# EAGLE board ANAL_3_ETH REV 1_0B (EAGLE 7.6.0)
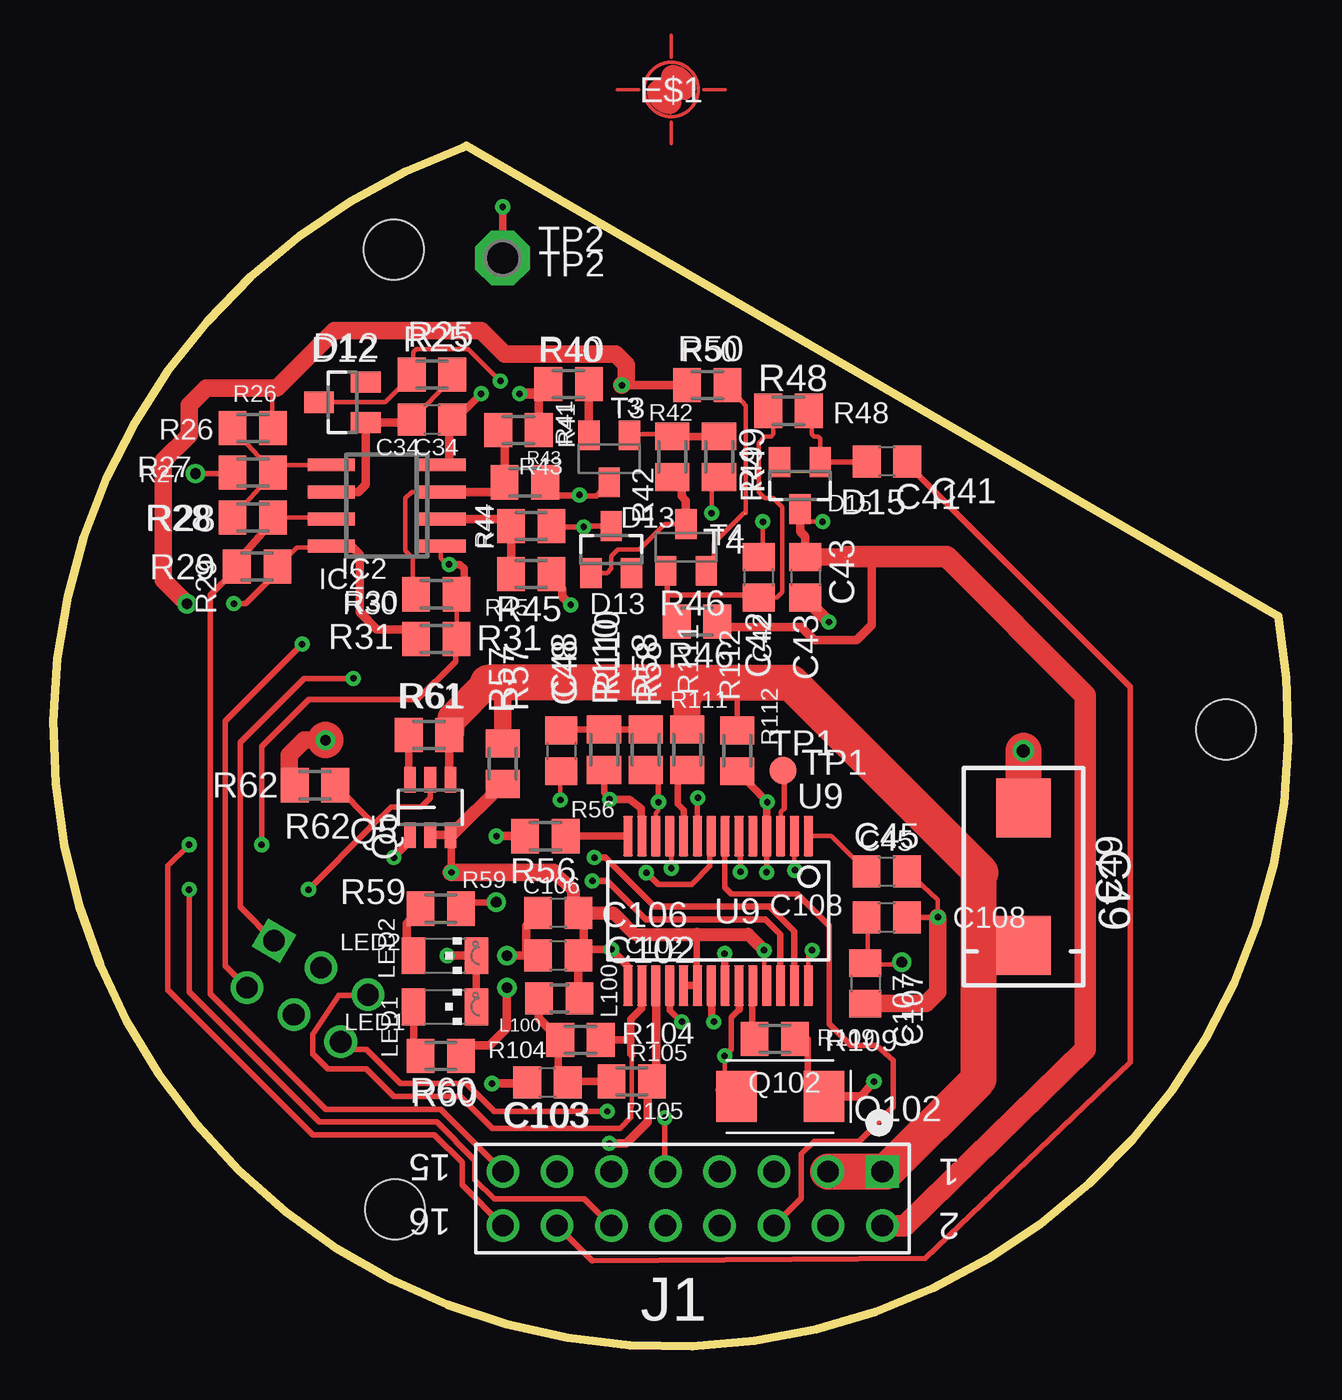
[diagram p0: board, top side]
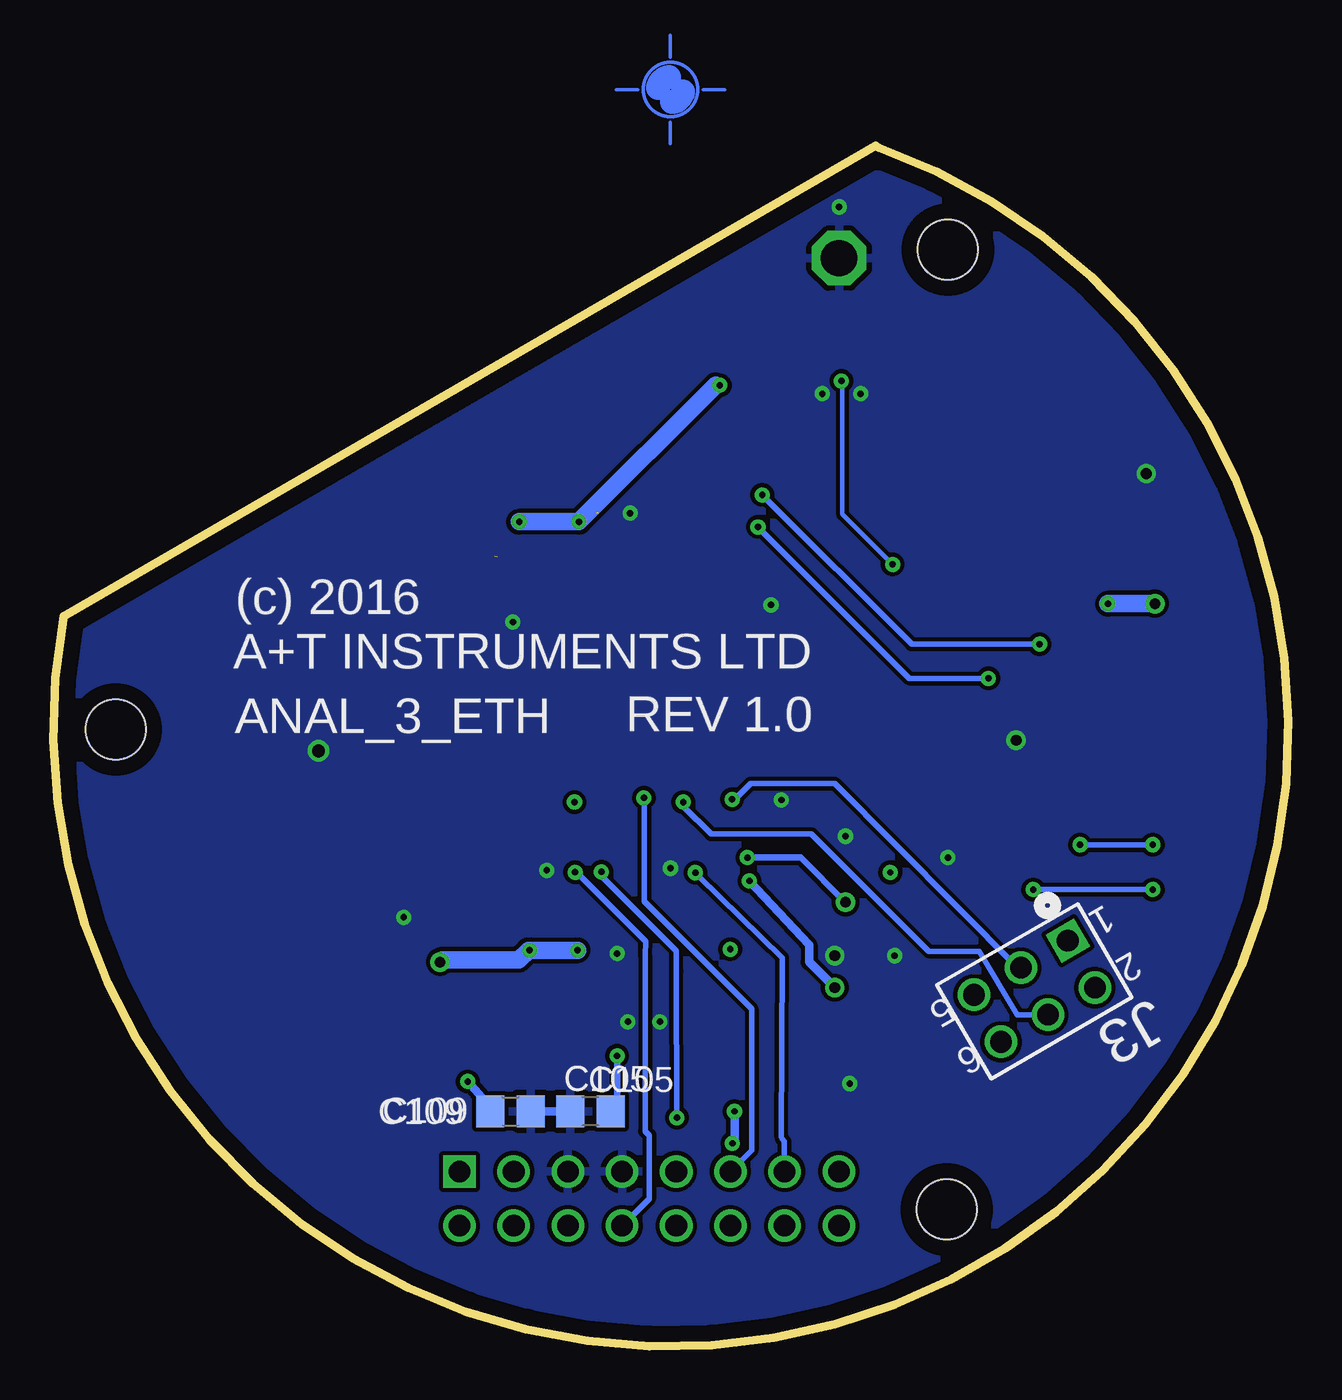
[diagram p1: board, bottom side, seen from below]

Size 57.88 x 56.27 mm. Coordinates in mm from the lower left corner, seen from the top.
Outline: 19.34,56.27 57.26,34.31
Outline: 57.4,34.22 arc-261 19.19,56.18
Copper layers (1*2*15*16): Top-VerticalRoutes 0.035mm / dielectric 0.5mm / GND 0.035mm / dielectric 0.5mm / 3V3&5V 0.035mm / dielectric 0.5mm / BottomnHorizontalroutes 0.035mm
Design rules "default *": minimum track width 0.2mm, minimum drill 0.3mm, track to track 6mil, track to pad 6mil, pad to pad 6mil, via to via 6mil, smd to smd 6mil, copper to edge 30mil, drill to drill 8mil, minimum pad ring 10mil, minimum via ring 8mil, stop-mask expansion 4mil, vias tented up to drill 0.31mm, thermal gap 10mil
Net classes: 0 default: width 0.2 mm, drill 0.2 mm, clearance 0.2 mm; 1 GND: width 0.2 mm, drill 0.2 mm, clearance 0.2 mm to class 0, clearance 0.2 mm; 2 5V: width 0.2 mm, drill 0.2 mm, clearance 0.2 mm to class 0, clearance 0.2 mm; 3 3v3: width 0.2 mm, drill 0.2 mm, clearance 0.2 mm to class 0, clearance 0.2 mm to class 1, clearance 0.2 mm to class 2, clearance 0.2 mm
Holes 2.8 mm at 15.96,51.41 54.96,28.91 16.01,6.41

## Footprints (pad centres in the part's own frame; a part is rotated, then mirrored left to right if it is on the bottom)
C0805 = smd 1.3 x 1.5: 1 -0.95,0; 2 0.95,0
CAPC7343X31 = smd 2.77 x 2.55: + 3.22,0; - -3.22,0
SOT23 = smd 1 x 1.4: 1 -0.95,-1.1; 2 0.95,-1.1; 3 0,1.1
SO08 = smd 0.6 x 2.2: 1 -1.905,-2.6; 2 -0.635,-2.6; 3 0.635,-2.6; 4 1.905,-2.6; 5 1.905,2.6; 6 0.635,2.6; 7 -0.635,2.6; 8 -1.905,2.6
SAMTEC_TSW-108-08-L-D = drill 1.016 square: 1 -17.78,-2.54 | drill 1.016: 2 -17.78,0; 3 -15.24,-2.54; 4 -15.24,0; 5 -12.7,-2.54; 6 -12.7,0; 7 -10.16,-2.54; 8 -10.16,0; 9 -7.62,-2.54; 10 -7.62,0; 11 -5.08,-2.54; 12 -5.08,0; 13 -2.54,-2.54; 14 -2.54,0; 15 0,-2.54; 16 0,0
SAMTEC_TSW-103-08-L-D = drill 1.016 square: 1 -5.08,-2.54 | drill 1.016: 2 -5.08,0; 3 -2.54,-2.54; 4 -2.54,0; 5 0,-2.54; 6 0,0
INDC2012X90 = smd 1.3 x 1.5: 1 -0.95,0; 2 0.95,0
LEDC3216X110L60N = smd 1.73 x 1.1: A 0,-1.47; C 0,1.47
SOT23-6 = smd 0.55 x 1.2: 1 -0.95,-1.3; 2 0,-1.3; 3 0.95,-1.3; 4 0.95,1.3; 5 0,1.3; 6 -0.95,1.3
ABRACON-ABM3 = smd 1.9 x 2.4: 1 -2.05,0; 2 2.05,0
M0805 = smd 1.3 x 1.6: 1 -0.95,0; 2 0.95,0
SOT23-BEC = smd 1 x 1.4: B -0.95,-1.1; C 0,1.1; E 0.95,-1.1
B1,27 = smd 1.27 x 1.27: TP 0,0
P1-17 = drill 1.702 pad 2.54 octagon: TP 0,0
SOP65P780X200-28N = smd 0.45 x 1.9: 1 -4.225,-3.505; 2 -3.575,-3.505; 3 -2.925,-3.505; 4 -2.275,-3.505; 5 -1.625,-3.505; 6 -0.975,-3.505; 7 -0.325,-3.505; 8 0.325,-3.505; 9 0.975,-3.505; 10 1.625,-3.505; 11 2.275,-3.505; 12 2.925,-3.505; 13 3.575,-3.505; 14 4.225,-3.505; 15 4.225,3.505; 16 3.575,3.505; 17 2.925,3.505; 18 2.275,3.505; 19 1.625,3.505; 20 0.975,3.505; 21 0.325,3.505; 22 -0.325,3.505; 23 -0.975,3.505; 24 -1.625,3.505; 25 -2.275,3.505; 26 -2.925,3.505; 27 -3.575,3.505; 28 -4.225,3.505

## Placement (x,y rotation side)
C34  1n  [C0805]  17.75,43.45 0 top
C41  10u  [C0805]  39.07,41.47 180 top
C42  1n  [C0805]  33.05,36.05 270 top
C43  100n  [C0805]  35.25,36.05 270 top
C45  10u  [C0805]  39.06,22.26 0 top
C48  100n  [C0805]  23.81,27.91 270 top
C49  100u  [CAPC7343X31]  45.47,22.01 270 top
C102  100n  [C0805]  23.66,18.31 180 top
C103  100n  [C0805]  23.16,12.36 180 top
C105  27p  [C0805]  32.71,11.01 180 bottom
C106  100n  [C0805]  23.66,20.31 180 top
C107  100n  [C0805]  38.06,17.01 270 top
C108  100n  [C0805]  39.06,20.11 0 top
C109  27p  [C0805]  36.46,11.01 0 bottom
D12  BAV199  [SOT23]  13.55,44.25 90 top
D13  BAV199  [SOT23]  26.15,37.35 0 top
D15  BAV199  [SOT23]  34.99,40.35 180 top
E$1  [PASS-ROUND]  28.96,58.91 0 top
E$3  [PASS-ROUND]  71.11,29.61 0 top  (outside the outline)
IC2  TLC393D  [SO08]  15.63,39.41 90 top
J1  TSW-108-14-F-D  [SAMTEC_TSW-108-08-L-D]  21.07,5.65 180 top
J3  TSW-103-14-F-D  [SAMTEC_TSW-103-08-L-D]  13.47,14.27 210 bottom
L100  120R@100M  [INDC2012X90]  23.71,16.31 180 top
LED1  GRN  [LEDC3216X110L60N]  18.36,15.91 270 top
LED2  YLW  [LEDC3216X110L60N]  18.36,18.31 270 top
Q5  TPS2708  [SOT23-6]  17.66,25.26 0 top
Q102  25MHz  [ABRACON-ABM3]  34.06,11.71 180 top
R25  680k  [M0805]  17.75,45.55 0 top
R26  47k  [M0805]  9.35,43.05 0 top
R27  56k  [M0805]  9.35,40.95 0 top
R28  200k  [M0805]  9.35,38.85 180 top
R29  4k7  [M0805]  9.55,36.55 0 top
R30  1M5  [M0805]  17.95,35.25 0 top
R31  47k  [M0805]  17.95,33.15 180 top
R40  82R  [M0805]  24.15,45.1 180 top
R41  1M5  [M0805]  21.8,42.95 0 top
R42  4k7  [M0805]  29,41.7 90 top
R43  47k  [M0805]  22.1,40.5 0 top
R44  47k  [M0805]  22.4,38.45 0 top
R45  470k  [M0805]  22.4,36.2 0 top
R46  10k  [M0805]  30.17,33.97 180 top
R48  10k  [M0805]  34.45,43.85 0 top
R49  4k7  [M0805]  31.2,41.7 270 top
R50  82R  [M0805]  30.65,45.05 0 top
R56  2.32k 1%  [M0805]  23.06,23.91 0 top
R57  DNF  [M0805]  21.06,27.31 90 top
R58  49R9  [M0805]  27.76,27.96 270 top
R59  180R  [M0805]  18.16,20.51 0 top
R60  180R  [M0805]  18.16,13.61 0 top
R61  DNF  [M0805]  17.61,28.66 0 top
R62  100k  [M0805]  12.26,26.3 0 top
R104  49R9  [M0805]  24.71,14.36 0 top
R105  49R9  [M0805]  27.11,12.41 180 top
R109  100R  [M0805]  33.81,14.41 180 top
R110  49R9  [M0805]  25.81,27.96 90 top
R111  100k  [M0805]  29.71,27.96 90 top
R112  100k  [M0805]  32.06,27.91 90 top
T3  BC817  [SOT23-BEC]  26.05,41.6 180 top
T4  BC807  [SOT23-BEC]  29.65,37.45 0 top
TP1  TPB1,27  [B1,27]  34.2,26.99 180 top
TP2  PTR1PAD1-17  [P1-17]  21.06,51.01 270 top
U9  ENC28J60-SOP  [SOP65P780X200-28N]  31.16,20.41 180 top

## Library data of the parts
C34 C41-C43 C45 C48 C102 C103 C105-C109 R25-R31 R40-R46 R48-R50 R56-R62 R104 R105 R109-R112 = rcl
C49 = Capacitors_AandT; DIGIKEY: 399-12105-1-ND; MANUFACTURER: Kemet; MOUSER: 80-T598D107M016E050; MPN: T598D107M016ATE050; PACKAGE: 7343; VOLTAGE: 16V
D12 D13 D15 = diode
E$1 E$3 = marks
IC2 = linear
J1 = SAMTEC-TSW-xxx-D_By_element14_Batch_1; MPN: TSW-108-14-F-D; OC_FARNELL: 2027002; PACKAGE: Post header-16Pin; SUPPLIER: Samtec
J3 = SAMTEC-TSW-xxx-D_By_element14_Batch_1; MPN: TSW-103-08-L-D; OC_FARNELL: 2025629; OC_NEWARK: 12P1330; PACKAGE: Post header-6Pin; SUPPLIER: Samtec
L100 = IND_AandT; FARNELL: 1635711; MANUFACTURER: WURTH; MPN: 74279202; RS: 358-6721
LED1 = led; FARNELL: 2062307
LED2 = led; FARNELL: 2062218; MANUFACTURER: Lumex; MPN: SML-LX1206SYC-TR
Q5 = Transistor_AandT; FARNELL: 2323775; MANUFACTURER: TI; MARKING: AUA; MPN: TPS27081A; PACKAGE: SOT23-6; RS: 809-5429
Q102 = Crystals_AnT; FARNELL: 2101328
T3 T4 = transistor
TP1 TP2 = testpad
U9 = Microchip_AandT; DIGIKEY: ENC28J60-I/SS-ND; FARNELL: 1811239; MANUFACTURER: MICROCHIP; MPN: ENC28J60-I/SS; PACKAGE: SSOP-28; RS: 770-7755

## Nets
+3V3 [3v3]: C49.+ J1.1 J1.3 Q5.4 R57.2 R61.2 R111.2 R112.2
+5V [5V]: C42.1 C43.1 D15.3 IC2.8 J1.2 R26.2 R29.2 R31.2 R46.1 R50.1
COMMSA: D13.3 J3.1 R44.2
COMMSB: J3.2 R43.2 T3.C
GND: C34.2 C43.2 C45.2 C48.2 C49.- C102.2 C103.2 C105.2 C106.2 C107.2 C108.2 C109.2 IC2.4 J1.5 J1.7 LED1.C LED2.C Q5.1 R27.1 R40.2 R41.2 R45.2 R49.2 R56.1 R62.1 TP2.TP U9.2 U9.11 U9.18 U9.21 U9.22
LDA: LED1.A R60.1
LDB: LED2.A R59.1
LEDA: R59.2 U9.27
LEDB: R60.2 U9.26
N$1: IC2.2 R44.1 R45.1
N$3: C34.1 D12.1 IC2.6 R25.2
N$4: IC2.3 R30.1 R41.1 R43.1
N$5: Q5.6 R61.1
N$6: R40.1 T3.E
N$7: R50.2 T4.E
N$8: R42.2 R49.1 T3.B
N$9: IC2.5 R26.1 R27.2 R28.2
N$14: R109.2 U9.24
N$15: C42.2 R46.2 R48.1 T4.B
N$16: C41.2 D15.1 R48.2
N$22: D13.1 R42.1 T4.C
N$41: C109.1 Q102.1 R109.1
N$64: C45.1 U9.1
N$160: C48.1 R58.1 R110.2
NETBUSY: IC2.7 J1.15 R28.1 R29.1
NETRX: D12.3 IC2.1 J1.16 R25.1 R30.2 R31.1
NETTX: C41.1 J1.14
OSC1: C105.1 Q102.2 U9.23
PHY3V3: C102.1 C106.1 C107.1 C108.1 L100.1 Q5.2 Q5.3 R57.1 U9.15 U9.19 U9.20 U9.25 U9.28
PHY-POWER: J1.12 Q5.5 R62.2
PHY_CS: J1.11 U9.9
PHY_INTERRUPT: J1.8 R112.1 U9.4
PHY_RESET: R111.1 U9.10
PHY_SCK: J1.13 U9.8
PHY_SI: J1.6 U9.7
PHY_SO: J1.9 U9.6
PHYCLKOUT: TP1.TP U9.3
RBIAS: R56.2 U9.14
TP3V3: C103.1 L100.2 R104.1 R105.2
TPIN+: J3.3 R110.1 U9.13
TPIN-: J3.4 R58.2 U9.12
TPOUT+: J3.6 R105.1 U9.17
TPOUT-: J3.5 R104.2 U9.16

## Tracks (layer width: path | path; a pad name or v marks a point on that pad's centre or on a via)
+3V3
  Top-VerticalRoutes 0.254: 31.91,28.86 32.06,29.01 32.06,31.11 | C49.+ 43.44,18.79 43.36,18.71
  Top-VerticalRoutes 0.35: Q5.4 18.56,26.61
  Top-VerticalRoutes 0.406: 18.56,26.61 R61.2
  Top-VerticalRoutes 0.813: R112.2 31.91,28.86 | 18.61,28.71 R61.2 | R57.2 21.06,31.11
  Top-VerticalRoutes 1.27: 29.71,30.46 R111.2 29.71,30.66 30.36,31.11 | 18.61,28.71 18.71,29.46
  Top-VerticalRoutes 1.422: 29.71,30.46 29.76,31.11 | 18.71,29.46 20.36,31.11
  Top-VerticalRoutes 1.676: 29.76,31.11 21.06,31.11 20.36,31.11 | 30.36,31.11 32.06,31.11 34.56,31.11 43.46,22.21 43.36,22.11 43.36,18.71 43.36,12.51 39.04,8.19 J1.1 J1.3
+5V  (via drill 0.3, 0.5)  (1 unrouted)
  Top-VerticalRoutes 0.2: C42.1 33.05,37.35 33.25,37.55 v33.25,38.65 | D15.3 35.05,38.79 35.05,38.65 v36.05,38.65 | 12.48,37.5 arc45 12.35,37.45 11.4,37.45 R29.2 | 10.25,44.95 10.25,43.1 R26.2
  Top-VerticalRoutes 0.254: v8.46,34.81 9.03,34.81 10.5,36.28 R29.2 | 10.46,44.91 10.42,44.95 10.25,44.95
  Top-VerticalRoutes 0.406: C43.1 35.25,37.95 35,38.2 D15.3 | 27.75,45.05 v26.65,45.05 R50.1 | 12.48,37.5 IC2.8 13.96,37.5 14.36,37.11 14.36,34.41 15.16,33.61 16.54,33.61 R31.2 | R46.1 31.38,33.71 35.06,33.71 35.66,33.11 37.66,33.11 38.36,33.81 38.36,37.01
  Top-VerticalRoutes 0.813: C43.1 37.09,37 | v26.65,45.05 26.86,45.26 26.86,46.01 26.36,46.51 21.16,46.51 20.06,47.61 13.16,47.61 10.46,44.91 7.16,44.91 6.36,44.11 6.36,42.71 5.16,41.51 5.16,35.91 v6.26,34.81
  Top-VerticalRoutes 1.016: 37.2,37.01 38.36,37.01 41.86,37.01 48.36,30.51 48.36,13.91 39.9,5.65 J1.2
  BottomnHorizontalroutes 0.254: v8.46,34.81 8.36,34.91
  BottomnHorizontalroutes 0.406: v26.65,45.05 26.85,45.05
  BottomnHorizontalroutes 0.813: v36.05,38.65 v33.25,38.65 26.85,45.05 | v6.26,34.81 v8.46,34.81
COMMSA  (via drill 0.3)
  Top-VerticalRoutes 0.254: J3.1 8.76,20.59 8.76,28.31 11.76,31.31 v14.06,31.31 | R44.2 23.39,38.41 v24.86,38.41 24.9,38.45 D13.3
  BottomnHorizontalroutes 0.254: v24.86,38.41 17.76,31.31 v14.06,31.31
COMMSB  (via drill 0.3)
  Top-VerticalRoutes 0.254: T3.C 25.45,39.85 23.45,39.85 R43.2 23.64,39.91 v24.66,39.91 | J3.2 8.06,17.82 8.06,29.31 v11.66,32.91
  BottomnHorizontalroutes 0.254: v24.66,39.91 17.66,32.91 v11.66,32.91
GND  (via drill 0.3, 0.5, 0.6)
  Top-VerticalRoutes 0.2: R49.2 30.9,40.7 30.9,40.35 30.85,40.35 v30.85,39.05 | U9.2 34.73,22.33 v34.76,22.31 | C48.2 24.36,26.91 | 23.76,27.01 v23.76,25.61 | 29.38,15.08 v29.46,15.21 | U9.11 28.96,23.79 v28.96,22.41 | C108.2 39.91,20.06 39.86,20.11 | R27.1 8.36,41.41 8.36,40.35 | v41.46,20.11 41.46,20.91 C45.2
  Top-VerticalRoutes 0.254: 39.86,20.11 v41.46,20.11 41.56,20.11 | IC2.4 18.55,41.31 18.56,41.31 | 18.56,43.31 C34.2 | R27.1 8.36,40.91 v6.66,40.91
  Top-VerticalRoutes 0.305: 23.76,27.01 C48.2 | U9.18 28.88,15.73 v29.46,15.21
  Top-VerticalRoutes 0.35: 18.75,43.4 19.4,44 v20.05,44.65 | U9.22 31.46,16.93 v31.46,18.41 | U9.21 30.86,16.88 30.86,15.31 v30.96,15.21 | LED1.C LED2.C | Q5.1 16.66,23.91 16.66,23.81 16.76,23.71 v15.96,22.91 | TP2.TP v21.06,53.41
  Top-VerticalRoutes 0.406: 18.75,43.4 C34.2 | R56.1 v20.76,23.91 | R45.2 23.85,35.5 23.85,35.15 v24.25,34.75 | R40.2 22.75,44.65 R41.2 | LED2.C v18.46,18.31 | 21.16,18.31 v21.26,18.31 22.06,18.31 | C102.2 22.06,18.31 | C106.2 22.71,20.26 22.16,19.71 22.16,18.41 22.06,18.31 | C103.2 22.16,12.31 v20.56,12.31 | 18.56,41.31 18.56,43.31
  Top-VerticalRoutes 0.5: 22.75,44.65 v21.85,44.65
  Top-VerticalRoutes 0.61: 36.4,33.95 v36.35,33.95 35.25,35.05 C43.2
  Top-VerticalRoutes 0.813: R62.1 11.06,26.55 11.06,27.71 11.76,28.41 v12.76,28.41 | C107.2 40.91,16.06 41.46,16.61 v41.46,20.11
  Top-VerticalRoutes 1.676: v12.75,28.42 v12.76,28.41 | C49.- v45.47,27.9 v45.46,27.91
  BottomnHorizontalroutes 0.2: C105.2 34.06,11.61
  BottomnHorizontalroutes 0.406: C109.2 C105.2
  pour BottomnHorizontalroutes: 56.72,33.54 57.1,28.7 56.44,23.36 55.29,19.34 53.64,15.92 51.43,12.29 48.3,8.77 44.88,5.74 41.31,3.59 36.9,1.94 32.12,0.89 25.68,0.89 20.56,2.1 16.65,3.76 11.09,7.17 5.76,13.01 2.12,20.11 0.91,25.29 0.8,31.29 1.74,36.24 3.44,40.81 5.54,44.72 8.84,48.63 12.25,51.5 17.63,54.7 19.1,55.33
LDA
  Top-VerticalRoutes 0.35: R60.1 16.96,14.06 16.96,14.21 16.89,14.28 LED1.A
LDB
  Top-VerticalRoutes 0.305: R59.1 17.06,20.51
  Top-VerticalRoutes 0.406: 17.06,20.51 17.06,20.41 16.56,19.81 16.56,18.74 LED2.A
LEDA  (via drill 0.3, 0.5)
  Top-VerticalRoutes 0.305: U9.27 34.73,19.43 33.56,20.61 28.16,20.61 25.86,22.91 v25.36,22.91 | R59.2 19.36,20.81 v20.76,20.81
  Top-VerticalRoutes 0.35: U9.27 34.76,16.88
  BottomnHorizontalroutes 0.305: v25.36,22.91 22.86,22.91 v20.76,20.81
LEDB  (via drill 0.3, 0.5)
  Top-VerticalRoutes 0.305: 34.06,16.88 34.06,19.31 33.36,20.01 27.76,20.01 25.96,21.81 v25.26,21.81
  Top-VerticalRoutes 0.35: U9.26 34.06,16.88
  Top-VerticalRoutes 0.406: v21.26,16.81 21.26,14.91 20.46,14.11 19.61,14.11 R60.2
  BottomnHorizontalroutes 0.406: v25.26,21.81 22.46,18.81 22.46,18.01 v21.26,16.81
N$1
  Top-VerticalRoutes 0.406: IC2.2 20.82,38.77 R44.1 R45.1
N$3
  Top-VerticalRoutes 0.2: 18.7,45.35 C34.1
  Top-VerticalRoutes 0.406: R25.2 18.7,45.35 | IC2.6 14.29,40.04 14.65,40.4 D12.1 16.65,43.3 C34.1
N$4
  Top-VerticalRoutes 0.2: IC2.3 16.8,40.05 16.5,39.75 16.5,37.3 16.85,36.95 16.85,35.5 R30.1
  Top-VerticalRoutes 0.406: R41.1 20.85,42.45 21.15,42.45 R43.1 20.69,40.04 IC2.3
N$5
  Top-VerticalRoutes 0.35: Q5.6 16.66,26.61 R61.1
N$6
  Top-VerticalRoutes 0.406: T3.E R40.1
N$7  (1 unrouted)
  Top-VerticalRoutes 0.2: 32.45,39.05 32.45,44.1 R50.2 | 32.35,39.05 30.95,37.65 30.95,36.7 T4.E
N$8
  Top-VerticalRoutes 0.2: T3.B 27.6,42.75 29.05,42.75 29.05,42.7 R42.2
  Top-VerticalRoutes 0.35: R49.1 R42.2
N$9
  Top-VerticalRoutes 0.2: R28.2 R27.2 | R26.1 R27.2 | R27.2 10.55,40.95 arc90 10.75,41.15 10.75,41.35 10.78,41.31 IC2.5
N$14
  Top-VerticalRoutes 0.2: 32.81,16.83 U9.24
  Top-VerticalRoutes 0.305: R109.2 32.86,14.91 32.76,15.01 32.76,16.21 32.81,16.83
N$15
  Top-VerticalRoutes 0.2: R48.1 33.75,43.8 33.75,42.75 33.65,42.65 33.35,42.65 33.05,42.35 33.05,40.05 33.35,39.75 33.75,39.75 34.15,39.35 34.15,35.35 33.9,35.1 C42.2 32.9,35.25
  Top-VerticalRoutes 0.254: 32.9,35.25 32.86,35.21 28.76,35.21 | T4.B 28.76,36.29 28.76,35.21 | 28.76,35.21 28.76,34.41 29.2,33.97 R46.2
N$16
  Top-VerticalRoutes 0.2: R48.2 35.55,43.8 35.55,42.75 35.65,42.65 35.85,42.65 35.95,42.55 D15.1
  Top-VerticalRoutes 0.254: C41.2 38.1,41.45 D15.1
N$22
  Top-VerticalRoutes 0.2: T4.C 28.65,38.55 27.45,37.35 26.45,37.35 26.15,37.05 26.15,36.45 25.95,36.25 D13.1
  Top-VerticalRoutes 0.406: T4.C 29.65,39.65 29.45,39.85 29.45,40.3 R42.1
N$41  (via drill 0.3)
  Top-VerticalRoutes 0.2: 35.36,11.76 Q102.1
  Top-VerticalRoutes 0.305: R109.1 35.36,14.41 35.36,11.76
  Top-VerticalRoutes 0.406: Q102.1 37.86,11.71 v38.46,12.41
  BottomnHorizontalroutes 0.406: v38.46,12.41 37.46,11.26 C109.1
N$64
  Top-VerticalRoutes 0.2: U9.1 36.46,23.91 C45.1
N$160
  Top-VerticalRoutes 0.305: R58.1 R110.2 23.86,28.91 C48.1
NETBUSY
  Top-VerticalRoutes 0.2: 13,38.75 IC2.7 arc90 12.95,38.85 R28.1 10.15,38.25 | R29.1 arc90 9,36.85 9,37.2
  Top-VerticalRoutes 0.254: J1.15 18.15,11.11 12.76,11.11 7.36,16.51 7.36,35.21 8.6,36.45 R29.1
  Top-VerticalRoutes 0.35: 9,37.2 9.96,38.31 10.09,38.31 arc-90 10.15,38.25
NETRX  (via drill 0.3)
  Top-VerticalRoutes 0.2: R31.1 R30.2 | 18.9,35.4 18.85,35.35 R30.2 | R30.2 18.9,35.4 | 18.9,35.4 18.9,35.5 | 16.8,45.8 R25.1 16.85,45.3 | D12.3 15.55,44.25 16.35,45.05 16.85,45.3 | v20.95,45.25 19.45,46.75 17,46.75 16.86,46.61 16.85,45.3 | IC2.1 18.15,37.42 18.15,36.95 18.35,36.75 v18.55,36.65
  Top-VerticalRoutes 0.254: R31.1 18.86,32.11 17.06,30.31 11.96,30.31 9.76,28.11 v9.76,23.51 | J1.16 19.16,7.56 19.16,8.61 17.86,9.91 12.16,9.91 5.36,16.71 5.36,22.51 v6.36,23.51
  Top-VerticalRoutes 0.35: v18.55,36.65 19.05,36.65 19.25,36.45 19.25,35.7 R30.2
  Top-VerticalRoutes 0.406: IC2.1
  BottomnHorizontalroutes 0.2: v18.55,36.65 20.91,39.01 20.91,45.25 v20.95,45.25
  BottomnHorizontalroutes 0.254: v9.76,23.51 v6.36,23.51
NETTX
  Top-VerticalRoutes 0.254: J1.14 23.66,5.6 25.26,4.01 40.86,4.11 50.46,13.31 50.46,30.91 40.02,41.35 C41.1
OSC1  (via drill 0.3)
  Top-VerticalRoutes 0.2: v31.46,13.61 31.46,12.21 31.26,12.01 31.11,12.01 Q102.2
  Top-VerticalRoutes 0.254: v31.46,13.61 31.76,13.91 31.76,15.41 31.96,15.61
  Top-VerticalRoutes 0.305: 32.13,15.78 31.96,15.61
  Top-VerticalRoutes 0.35: U9.23 32.13,15.78
  BottomnHorizontalroutes 0.305: C105.1 31.46,11.41 v31.46,13.61
PHY3V3  (via drill 0.3, 0.5 pad 0.25)
  Top-VerticalRoutes 0.2: U9.28 35.38,18.53 v35.56,18.56 | U9.25 33.33,17.58 33.31,17.81 v33.31,18.56 | U9.20 30.16,16.93 | C108.1 38.16,19.81 38.16,18.26 arc-90 37.96,18.06 C107.1 37.46,17.91 39.56,17.91 v39.76,18.01
  Top-VerticalRoutes 0.305: 30.16,16.93 30.16,19.31 | C106.1 24.61,20.16 24.86,19.91
  Top-VerticalRoutes 0.35: Q5.3 18.66,23.91 v18.66,22.21 | U9.19 U9.20 | U9.15 26.93,17.78 v26.16,18.61 24.91,18.61 C102.1
  Top-VerticalRoutes 0.406: Q5.2 Q5.3 | 24.36,20.26 C106.1 | L100.1 24.61,16.36 C102.1 24.86,18.56 24.86,19.91
  Top-VerticalRoutes 0.61: C106.1 26.26,20.31 27.26,19.31 30.16,19.31 32.56,19.31 v33.31,18.56 | 23.46,22.21 24.36,21.41 24.36,20.26 | R57.1 18.66,23.96 Q5.3
  Top-VerticalRoutes 0.813: v18.66,22.21 23.46,22.21
  BottomnHorizontalroutes 0.813: v33.31,18.56 v35.56,18.56 35.61,18.56 36.06,18.11 39.66,18.11 v39.76,18.01
PHY-POWER  (via drill 0.3)
  Top-VerticalRoutes 0.254: Q5.5 17.66,25.7 17.25,25.29 15.84,25.29 14.91,24.36 | 14.91,24.36 v11.96,21.41 | J1.12 24.89,6.91 20.66,6.91 19.76,7.81 19.76,8.71 17.96,10.51 12.46,10.51 6.36,16.61 v6.36,21.41 | R62.2 14.91,24.6 14.91,24.36
  BottomnHorizontalroutes 0.254: v11.96,21.41 v6.36,21.41
PHY_CS  (via drill 0.3)  (1 unrouted)
  Top-VerticalRoutes 0.2: v30.21,25.71 30.16,23.94 U9.9
  Top-VerticalRoutes 0.254: U9.9 30.18,25.72 30.19,25.73
  BottomnHorizontalroutes 0.254: 30.19,25.73 30.19,20.84 25.16,15.81 25.16,9.18 J1.11
PHY_INTERRUPT  (via drill 0.3)
  Top-VerticalRoutes 0.254: U9.4 33.43,22.53 v33.43,22.22
  Top-VerticalRoutes 0.35: R112.1 v33.46,25.51 33.43,25.48 U9.4
  BottomnHorizontalroutes 0.254: J1.8 29.96,6.92 29.95,9.89 30.15,10.08 30.15,18.33 30.13,18.98 33.36,22.21 33.46,22.19 v33.43,22.22
PHY_RESET
  Top-VerticalRoutes 0.305: 29.53,26.83 R111.1 29.16,27.01 29.26,26.91 29.26,25.41 29.53,25.13 U9.10
PHY_SCK  (via drill 0.3)
  Top-VerticalRoutes 0.2: 30.86,24.71 U9.8
  Top-VerticalRoutes 0.254: U9.8 30.76,23.84 30.76,22.51 29.92,21.64 28.34,21.64 v27.79,22.2
  BottomnHorizontalroutes 0.254: J1.13 23.62,9.6 23.73,9.71 23.76,9.81 23.73,18.21 27.64,22.02 v27.79,22.2
PHY_SI
  Top-VerticalRoutes 0.2: 31.46,23.11 U9.7 31.46,23.94
  Top-VerticalRoutes 0.254: 31.46,23.11 31.46,21.51 31.76,21.21 34.86,21.21 36.36,19.71 36.36,15.11 37.36,14.11 38.56,14.11 39.36,13.41 39.36,11.21 37.76,9.61 35.66,9.61 35.06,9.01 35.06,6.94 J1.6
PHY_SO  (via drill 0.3)
  Top-VerticalRoutes 0.2: 32.16,23.94 U9.6 32.05,23.91
  Top-VerticalRoutes 0.254: U9.6 32.13,23.13 32.2,23.07 v32.2,22.24 | v28.66,10.71 28.66,8.22 J1.9
  BottomnHorizontalroutes 0.254: v28.66,10.71 28.68,17.58 28.68,18.52 32.19,22.03 v32.2,22.24
PHYCLKOUT
  Top-VerticalRoutes 0.2: U9.3 34.08,25.03 34.26,25.21 | 34.21,26.8 TP1.TP
  Top-VerticalRoutes 0.254: 34.26,25.21 34.26,26.93 TP1.TP
RBIAS
  Top-VerticalRoutes 0.2: U9.14
  Top-VerticalRoutes 0.35: U9.14 R56.2
TP3V3
  Top-VerticalRoutes 0.35: R104.1 23.66,14.26 23.66,12.81 C103.1 24.16,12.41 R105.2
  Top-VerticalRoutes 0.406: L100.2 22.76,15.36 R104.1
TPIN+  (via drill 0.3)
  Top-VerticalRoutes 0.305: R110.1 25.81,25.96 v26.07,25.64
  Top-VerticalRoutes 0.35: U9.13 27.56,23.94 27.56,25.21 27.02,25.64 v26.07,25.64
  BottomnHorizontalroutes 0.254: v26.07,25.64 26.06,25.51 25.21,26.37 21.27,26.37 12.66,17.71 J3.3
TPIN-  (via drill 0.3)
  Top-VerticalRoutes 0.2: U9.12 28.23,24.98 28.36,25.11 v28.36,25.51 | 28.36,26.61 28.36,26.81 R58.2
  Top-VerticalRoutes 0.254: v28.36,25.51 28.36,26.61
  BottomnHorizontalroutes 0.254: v28.36,25.51 28.36,25.31 27.06,24.01 22.36,24.01 16.86,18.51 14.48,18.51 12.7,15.53 J3.4
TPOUT+  (via drill 0.3)
  Top-VerticalRoutes 0.254: v25.96,11.01 20.66,11.01 19.36,12.31 16.26,12.31 14.66,13.91 13.96,13.91 13.63,14.24 J3.6
  Top-VerticalRoutes 0.35: 28.16,11.91 28.26,12.91 | 28.26,12.91 28.26,14.01 | R105.1 28.06,12.71 28.26,12.91
  Top-VerticalRoutes 0.406: v26.06,9.51 26.86,9.51 27.86,10.51 27.86,11.91 28.06,12.31 28.26,12.51 28.26,14.01 28.26,16.88 U9.17
  BottomnHorizontalroutes 0.406: v26.06,9.51 25.96,9.61 v25.96,11.01
TPOUT-
  Top-VerticalRoutes 0.2: 27.11,13.66 27.11,11.36
  Top-VerticalRoutes 0.254: 27.11,11.36 27.07,11.19 27.07,10.72 26.56,10.21 20.56,10.21 19.06,11.71 15.96,11.71 14.66,13.01 12.86,13.01 12.16,13.71 12.16,14.61 13.37,16.45 14.67,16.45 J3.5
  Top-VerticalRoutes 0.35: U9.16 27.58,15.83 27.06,15.31 27.06,14.43 | R104.2 27.03,14.36 27.06,14.43 | 27.06,14.43 27.06,13.71 27.11,13.66

## Text on the board
Top-VerticalRoutes: Tplace updated | TOP COPPER
BottomnHorizontalroutes: BOTTOM COPPER
tPlace: IC2 | C45
tNames: TOP SILK
bNames: (c) 2016 | A+T INSTRUMENTS LTD | ANAL_3_ETH | REV 1.0 | BOTTOM SILK
tStop: TOP RESIST
bStop: BOTTOM SOLDER RESIST
tCream: TOP PASTE MASK
bCream: BOTTOM PASTE MASK